# EAGLE board servodengentest (EAGLE 9.6.2)
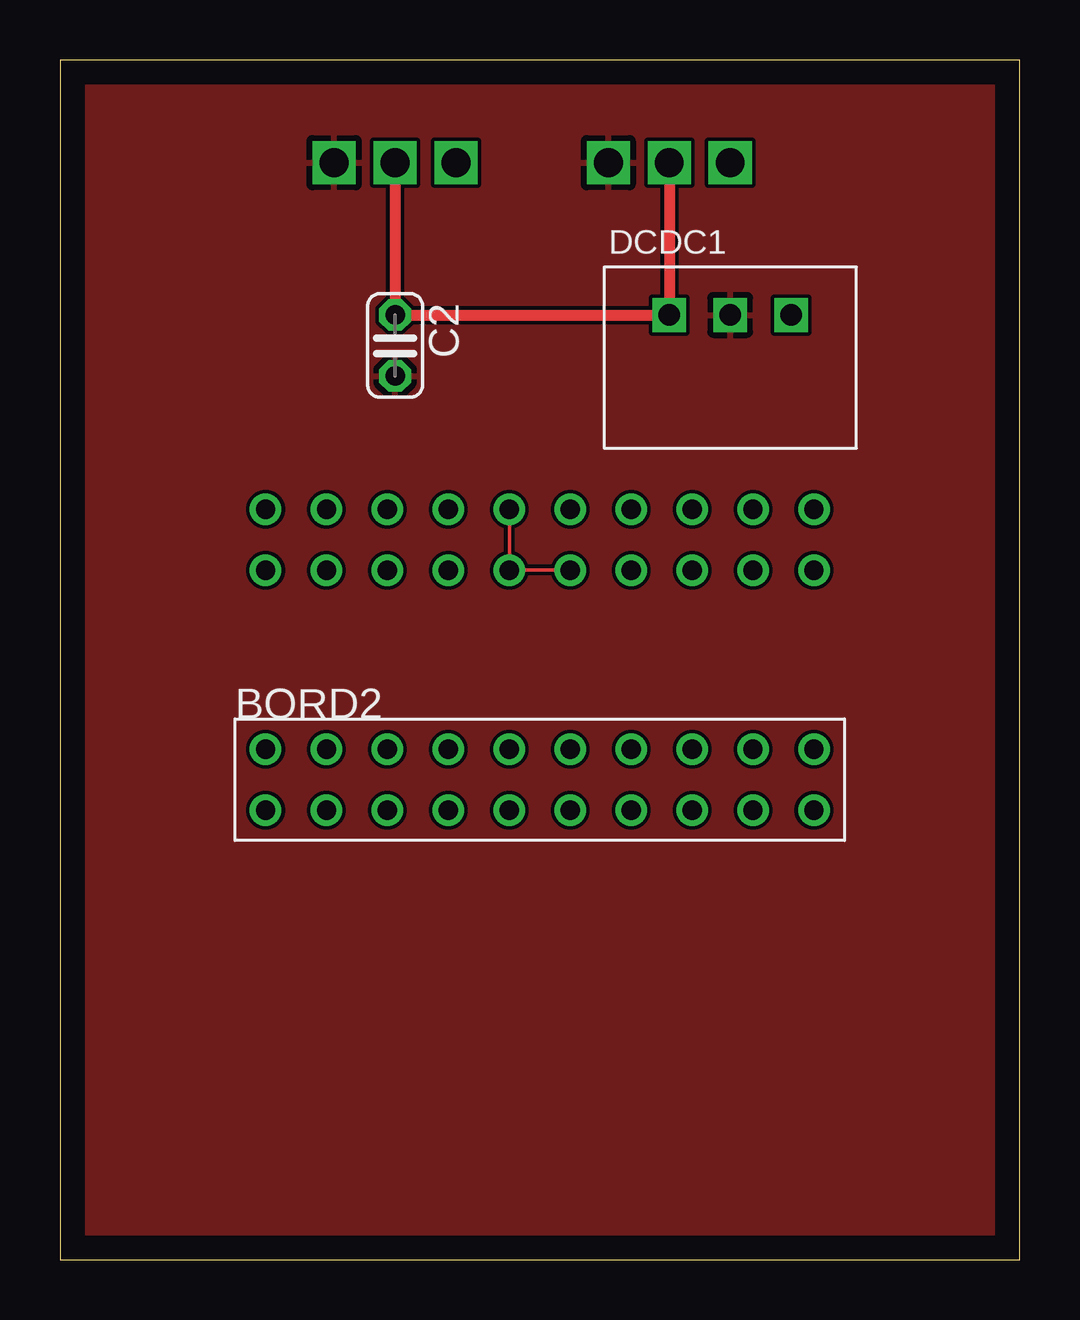
[diagram p0: board, top side]
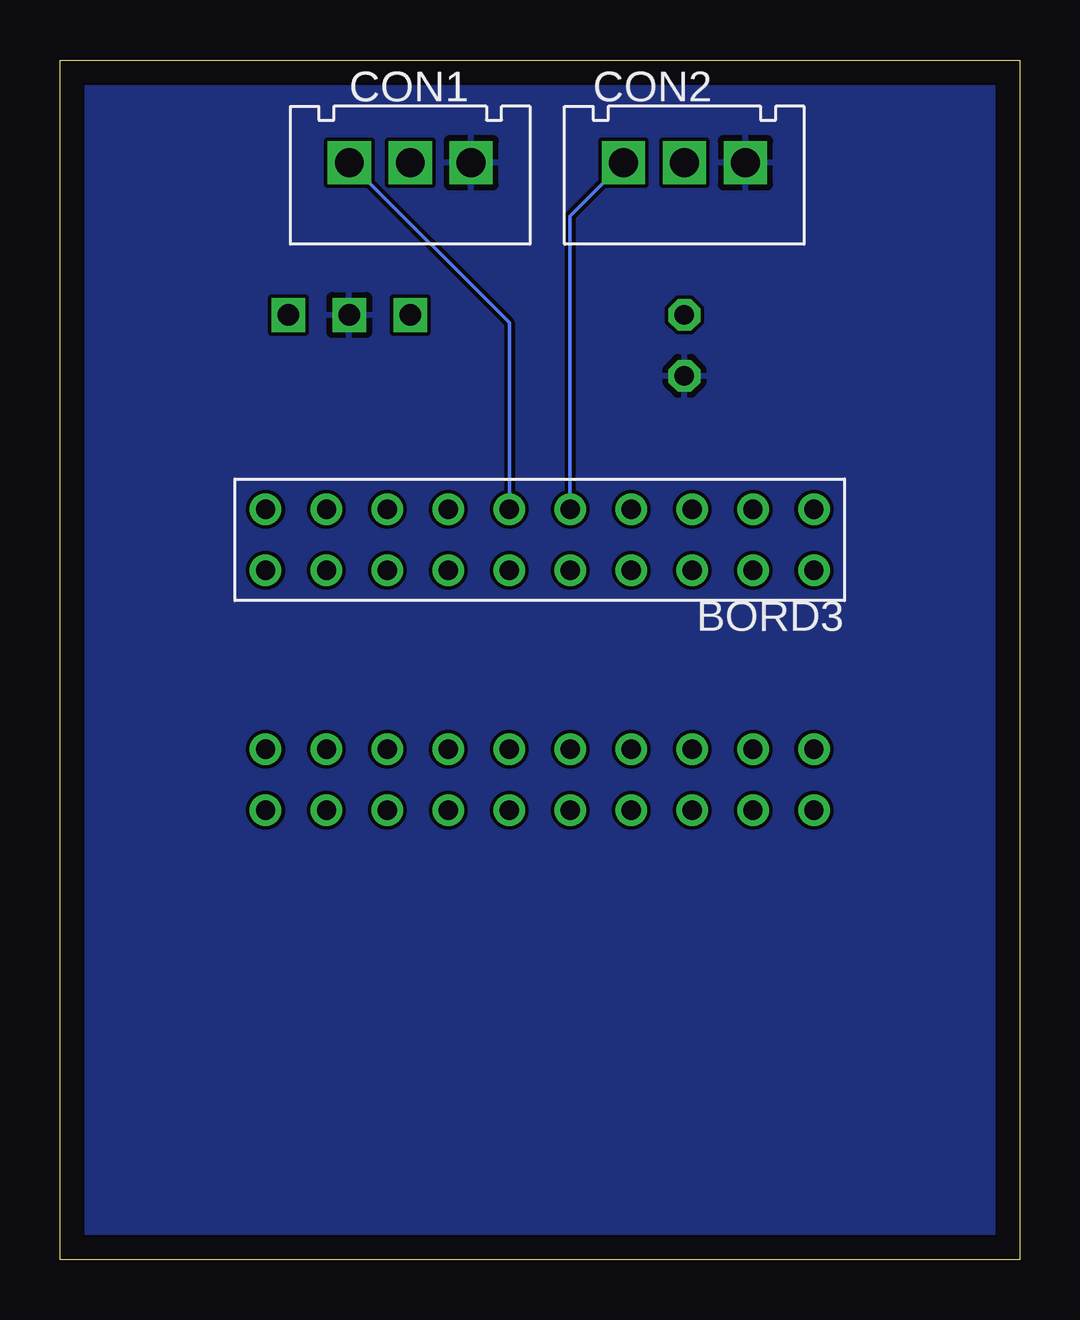
[diagram p1: board, bottom side, seen from below]

Size 40 x 50 mm. Coordinates in mm from the lower left corner, seen from the top.
Outline: 0,0 40,0 40,50 0,50 0,0
Copper layers (1*16): Top 0.035mm / dielectric 1.5mm / Bottom 0.035mm
Design rules "default": minimum track width 6mil, minimum drill 0.35mm, track to track 6mil, track to pad 6mil, pad to pad 6mil, via to via 6mil, smd to smd 6mil, copper to edge 40mil, drill to drill 6mil, minimum pad ring 10mil, minimum via ring 8mil, stop-mask expansion 4mil, vias tented up to drill 0mil, thermal gap 10mil
Net classes: 1 SIGNAL: width 0.152 mm, drill 0.152 mm, clearance 0.152 mm; 2 POWER_H: width 0.457 mm, drill 0.152 mm, clearance 0.152 mm; 3 POWER_L: width 0.305 mm, drill 0.152 mm, clearance 0.152 mm; 4 GND: width 0.305 mm, drill 0.152 mm, clearance 0.152 mm

## Footprints (pad centres in the part's own frame; a part is rotated, then mirrored left to right if it is on the bottom)
2X10 = drill 0.8: P$1 0,1.27; P$2 0,-1.27; P$3 -2.54,1.27; P$4 -2.54,-1.27; P$5 -5.08,1.27; P$6 -5.08,-1.27; P$7 -7.62,1.27; P$8 -7.62,-1.27; P$9 -10.16,1.27; P$10 -10.16,-1.27; P$11 -12.7,1.27; P$12 -12.7,-1.27; P$13 -15.24,1.27; P$14 -15.24,-1.27; P$15 -17.78,1.27; P$16 -17.78,-1.27; P$17 -20.32,1.27; P$18 -20.32,-1.27; P$19 -22.86,1.27; P$20 -22.86,-1.27
C025-024X044 = drill 0.813 octagon: 1 -1.27,0; 2 1.27,0
3PIN = drill 1.2 square: P$1 2.54,-2.54; P$2 5.08,-2.54; P$3 7.62,-2.54
5V1A_M78AR05-1 = drill 0.9 pad 1.27 square: GND 0,0; VIN 2.54,0; VOUT -2.54,0

## Placement (x,y rotation side)
BORD2  [2X10]  31.43,20 0 top
BORD3  [2X10]  31.43,30 180 bottom
C2  3.3uF  [C025-024X044]  13.97,38.1 270 top
CON1  [3PIN]  30.48,48.26 0 bottom
CON2  [3PIN]  19.05,48.26 0 bottom
DCDC1  [5V1A_M78AR05-1]  27.94,39.37 0 top

## Library data of the parts
BORD2 BORD3 = PinSocket
C2 = rcl; SPICEPREFIX: C
CON1 CON2 = XR Connector
DCDC1 = DC-DC

## Nets
+5V [POWER_H]: C2.1 CON1.P$2 CON2.P$2 DCDC1.VOUT
GND [GND]: C2.2 CON1.P$3 CON2.P$3 DCDC1.GND
RAW [SIGNAL]: DCDC1.VIN
SERVO1 [SIGNAL]: BORD3.P$10 CON1.P$1
SERVO2 [SIGNAL]: BORD3.P$9 BORD3.P$11 BORD3.P$12 CON2.P$1

## Tracks (layer width: path | path; a pad name or v marks a point on that pad's centre or on a via)
+5V
  Top 0.457: CON2.P$2 C2.1 DCDC1.VOUT CON1.P$2
GND
  pour Top: 7.62,-3.81 0,-3.81 -5.08,1.27 -5.08,48.26 1.27,54.61 35.56,54.61 39.37,54.61 45.72,48.26 45.72,1.27 40.64,-3.81
  pour Bottom: 0,-3.81 -5.08,1.27 -5.08,48.26 1.27,54.61 39.37,54.61 45.72,48.26 45.72,1.27 40.64,-3.81
SERVO1
  Bottom 0.152: CON1.P$1 21.27,39.05 BORD3.P$10
SERVO2
  Top 0.152: BORD3.P$12 BORD3.P$11 BORD3.P$9
  Bottom 0.152: CON2.P$1 18.73,43.5 BORD3.P$12